# Altium PCB K157YD2.PcbDoc
Units mil, origin at the board's own origin, x right, y up, seen from the top; angles counter-clockwise.
Board outline 255.91 x 255.91 mil, 2 copper layers (Top Layer, Top, Bottom Layer, Bottom); 28 components, 22 nets, 72 pads, 2 vias.
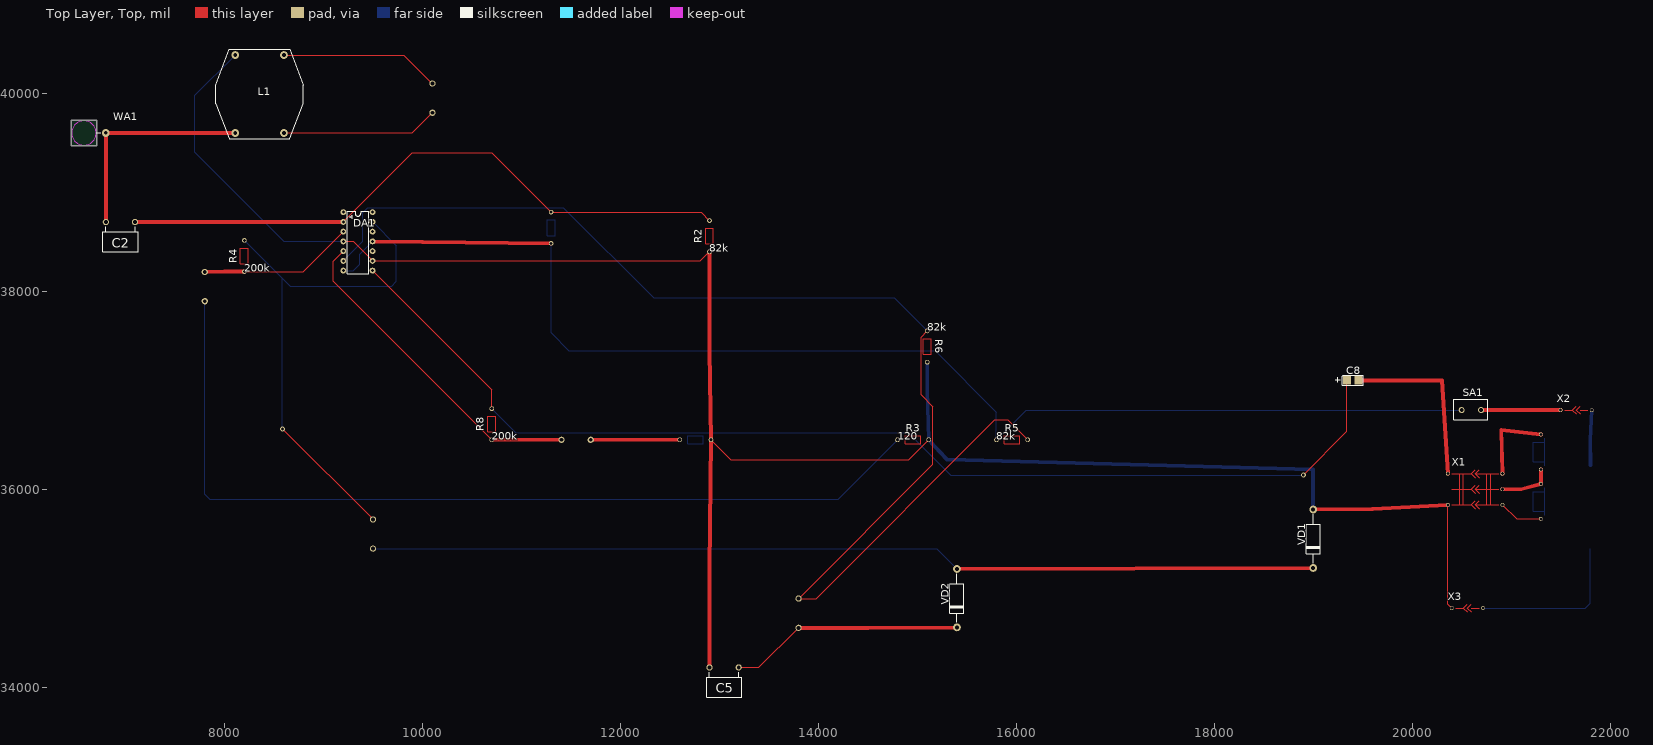
[diagram p0: Top Layer, Top view]
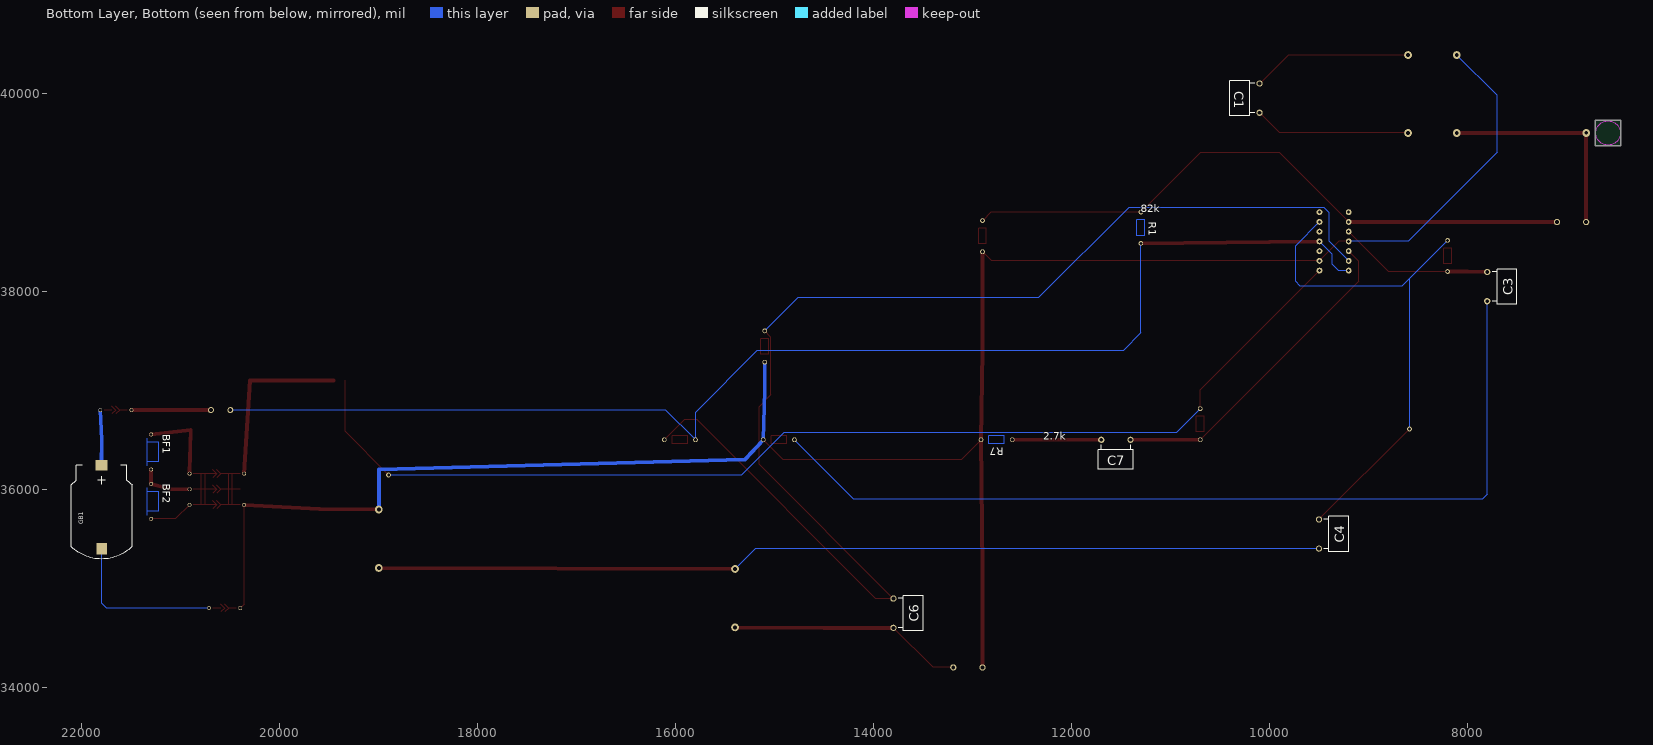
[diagram p1: Bottom Layer, Bottom view, seen from below]

## Layer stack, top to bottom
Top Solder, Top Mask: solder mask 0.4, Solder Resist, Dk 3.5
Top Layer, Top: signal copper 1.4
Dielectric 1: dielectric 12.6, FR-4, Dk 4.8
Bottom Layer, Bottom: signal copper 1.4
Bottom Solder, Bot Mask: solder mask 0.4, Solder Resist, Dk 3.5

## Board outline
6450.59,39472.05 6706.5,39472.05 6706.5,39727.95 6450.59,39727.95

## Design rules (kind name [scope] priority, off if disabled: settings)
Clearance [All] p1: gap=10 ignorepadtopadclearanceinfootprint=FALSE except(0: Arc-Hole Track-Hole SMDPad-Hole THPad-Hole Via-Hole Fill-Hole Poly-Hole Region-Hole Text-Hole; 11.81: Arc-Arc Arc-Track Arc-THPad Arc-Via Track-Track Track-THPad Track-Via THPad-THPad THPad-Via Via-Via)
PlaneClearance [All] p1: clearance=10
PolygonConnect [All] p1: connectstyle=Relief reliefconductorwidth=10 reliefentries=4 polygonreliefangle="90 Angle" airgapwidth=10
RoutingVias [All] p1: holewidth=28 width=50 viastyle="Through Hole" minholewidth=28 minwidth=50 maxholewidth=28 maxwidth=50
SolderMaskExpansion [All] p1: expansion=4
Width [All] p1: maxlimit=10 minlimit=10 preferedwidth=10
29 further rules are at their usual default settings.

## Components (designator, comment, footprint, x,y, rotation, side; value= is the part's Value field where it differs from the comment)
BF1 "" BF 21300,36200 r270 bottom
BF2 "" BF 21300,35700 r270 bottom
C1 "330" 1017-B3R 10100,40100 r270 bottom
C2 "4700" 1017-B3R 6800,38700 r0 top
C3 "4700" 1017-B3R 7800,37900 r90 bottom
C4 "4700" 1017-B3R 9500,35400 r90 bottom
C5 "0.01mk" 1017-B3R 12900,34200 r0 top
C6 "0.01mk" 1017-B3R 13800,34600 r90 bottom
C7 "0.01mk" 1017-B3R 11700,36500 r180 bottom
C8 "" CE3528-B 19400,37100 r0 top
DA1 "" DIP-14_MM 9200,38800 r0 top
GB1 "" BH023(CR2032)_SMD 21800,35400 r90 bottom
L1 "{Value}" B82722A 8600,39600 r0 top
R1 "82k" R100 11300,38800 r270 bottom
R2 "82k" R100 12900,38400 r90 top
R3 "120" R100 14800,36500 r0 top
R4 "200k" R100 8200,38200 r90 top
R5 "82k" R100 15800,36500 r0 top
R6 "82k" R100 15100,37600 r270 top
R7 "2.7k" R100 12600,36500 r0 bottom
R8 "200k" R100 10700,36500 r90 top
SA1 "" 8AS9M2RE 20500,36800 r0 top
VD1 "" DO-7_1N34(Primary) 19000,35500 r90 top
VD2 "" DO-7_1N34(Primary) 15400,34900 r90 top
WA1 "" TELESKOP_ANTENNA_Primary 6800,39600 r0 top
X1 "" X3 20400,36000 r0 top
X2 "" X 21500,36800 r0 top
X3 "" X 20400,34800 r0 top

## Footprints (in the part's own frame and the unit in brackets; to place one, negate y for a bottom-side part, rotate by r counter-clockwise, add the part's x,y. Pads: shape width x height; smd on the part's side, far side on the other; paste and mask are expansions set on the pad)
8AS9M2RE [mil]
  round 60 hole 38: 1(0,0) 2(196.85,0)
  silkscreen extent -79,-98 266,108
1017-B3R [mm]
  round 1.6 hole 1: 1(0,0) 2(7.5,0)
  silkscreen extent -0.76,-7.62 8.27,-1.26
B82722A [mm]
  round 2 hole 1: 1(0,0) 2(0,20) 3(-12.5,20) 4(-12.5,0)
  silkscreen extent -17.5,-1.5 5,21.5
BF [mm]
  round 1 hole 0.8: 1(0,0) 2(-9,0)
  Top Layer, Top lines w0.254: -1,-1 -8,-1 ; -2,-1 -2,2 -7,2 -7,-1
BH023(CR2032)_SMD [mm]
  rect 3x2.6 smd: 1(0,0)
  rect 2.6x3 smd: 2(21.4,0.05)
  silkscreen extent -2.67,-7.78 21.38,7.82
CE3528-B [mm]
  rect 2x2.2 smd: 1(-1.5,0) 2(1.5,0)
  silkscreen extent -4.44,-1.3 2.7,1.3
DIP-14_MM [mm]
  round 1.5 hole 0.8: 1(0,0) 2(0,-2.5) 3(0,-5) 4(0,-7.5) 5(0,-10) 6(0,-12.5) 7(0,-15) 8(7.5,-15) 9(7.5,-12.5) 10(7.5,-10) 11(7.5,-7.5) 12(7.5,-5) 13(7.5,-2.5) 14(7.5,0)
  silkscreen extent 1,-15.77 6.5,0.25
DO-7_1N34(Primary) [mm]
  round 2 hole 1: A(7.5,0) K(-7.5,0)
  silkscreen extent -6.25,-1.8 6.25,1.8
R100 [mm]
  round 1.2 hole 0.8: 1(0,0) 2(8,0)
  Top Layer, Top lines w0.254: 6,1 6,-1 2,-1 2,1 6,1
TELESKOP_ANTENNA_Primary [mm]
  round 2 hole 0.9: 1(0,0)
  Keep-Out Layer, Board lines w0.25: -8.75,0 ccw(c-5.625,0) -2.5,0 ccw(c-5.625,0) -8.75,0
  silkscreen extent -2.5,0 -1.25,0
X [mm]
  round 1 hole 0.8: 1(0,0) 2(8,0)
  Top Layer, Top lines w0.254: 1,0 3,0 ; 4,-1 3,0 ; 4,1 3,0 ; 5,-1 4,0 5,1 ; 5,0 7,0
X3 [mm]
  round 1 hole 0.8: 1(-1,4) 2(13,4) 3(13,0) 4(13,-4) 5(-1,-4)
  Top Layer, Top lines w0.254: 0,-4 5,-4 ; 0,0 5,0 ; 0,4 5,4 ; 2,-4 2,4 ; 3,-4 3,4 ; 6,-5 5,-4 ; 6,-3 5,-4 ; 6,-1 5,0 ; 6,1 5,0 ; 6,3 5,4 ; 6,5 5,4 ; 7,-5 6,-4 ; 7,-3 6,-4 ; 7,-1 6,0 ; 7,1 6,0 ; 7,3 6,4 ; 7,5 6,4 ; 9,-4 9,4 ; 10,-4 10,4 ; 12,-4 6,-4 ; 12,0 6,0 ; 12,4 6,4

## Via types
v1: diameter 50, hole 28, Top Layer, Top to Bottom Layer, Bottom, 2 vias

## Nets (pads, with @x,y where several pads share a name; then routed paths per layer and width w, separated by ;. In a path a pad name is that pad's centre, name@x,y a point inside that pad or via, vN(x,y) a via of type N, cw(c..) or ccw(c..) an arc to the next point about the centre after c; other vN are vias at no path point)
GND: C5.1 DA1.4 DA1.9 L1.3 R2.1 R3.2 R6.2 R7.2 VD1.A X1.5 X3.1 | length 20994.5
  Top Layer, Top w10: DA1.4 9298.43,38504.72 DA1.9 12807.87,38307.87 R2.1 ; R7.2 13114.96,36300 14914.96,36300 R3.2 ; X1.5 20360.63,34839.37 X3.1
  Top Layer, Top w39.37: C5.1 12900,35200 R7.2 12900,37400 R2.1 ; VD1.A 19600,35800 X1.5
  Bottom Layer, Bottom w10: L1.3 7700,39979.53 7700,39404.72 8600,38504.72 DA1.4
  Bottom Layer, Bottom w39.37: R6.2 15100,37000 R3.2 15300,36300 19000,36200 VD1.A
NET00000: C1.1 L1.2 | length 1619
  Top Layer, Top w10: L1.2 9812.6,40387.4 C1.1
NET00001: C1.2 L1.1 | length 1584.8
  Top Layer, Top w10: L1.1 9895.28,39600 C1.2
NET00002: C2.1 L1.4 WA1.1 | length 2207.9
  Top Layer, Top w39.37: C2.1 WA1.1 L1.4
NET00003: C2.2 DA1.2 R1.1 R2.2 | length 6377.8
  Top Layer, Top w10: DA1.2 9898.43,39400 10700,39400 R1.1 12814.96,38800 R2.2
  Top Layer, Top w39.37: C2.2 8600,38700 DA1.2
NET00005: C3.2 DA1.3 R4.1 | length 1567
  Top Layer, Top w10: R4.1 8796.85,38200 DA1.3
  Top Layer, Top w39.37: C3.2 8000,38200 R4.1
NET00006: C3.1 R3.1 | length 9219.2
  Bottom Layer, Bottom w10: C3.1 7800,35950 7850,35900 14200,35900 R3.1
NET00007: DA1.7 DA1.11 R1.2 R5.1 SA1.1 | length 13121.7
  Top Layer, Top w39.37: DA1.11 10000,38500 R1.2
  Bottom Layer, Bottom w10: DA1.7 9300,38209.45 9364.17,38273.62 9364.17,38373.62 DA1.11 ; R1.2 11300,37580 11480,37400 15180,37400 15800,36780 R5.1 16100,36800 SA1.1
NET00008: C4.2 DA1.13 R4.2 | length 5265.7
  Top Layer, Top w10: v1(8585,36610.28) C4.2
  Bottom Layer, Bottom w10: R4.2 8585,38129.96 ; v1(8585,36610.28) 8585,38129.96 ; DA1.13 9737,38459.85 9737,38100 9687,38050 8664.96,38050 8585,38129.96
NET00009: C4.1 VD1.K VD2.A | length 9584.8
  Top Layer, Top w39.37: VD2.A VD1.K
  Bottom Layer, Bottom w10: C4.1 15195.28,35400 VD2.A
NET00010: C5.2 C6.1 VD2.K | length 2370.4
  Top Layer, Top w10: C5.2 13400,34200 C6.1
  Top Layer, Top w39.37: C6.1 14500,34600 VD2.K
NET00011: C6.2 DA1.6 R5.2 R6.1 | length 13296.1
  Top Layer, Top w10: R6.1 15038,37538 15038,36953 15156,36835 15156,36251.28 C6.2 13979.28,34895.28 15784,36700 15914.96,36700 R5.2
  Bottom Layer, Bottom w10: DA1.6 9398,38505.87 9398,38796 9449,38847 11423,38847 12335,37935 14765,37935 R6.1
NET00012: C7.2 DA1.5 R8.1 | length 3315.2
  Top Layer, Top w10: DA1.5 9100,38306.3 9100,38100 R8.1
  Top Layer, Top w39.37: R8.1 C7.2
NET00013: C7.1 R7.1 | length 900
  Top Layer, Top w39.37: C7.1 R7.1
NET00014: C8.1 DA1.8 R8.2 | length 11510.1
  Top Layer, Top w10: DA1.8 10700,37004.72 R8.2 ; v1(18900,36144) 19340.94,36584.94 C8.1
  Bottom Layer, Bottom w10: R8.2 10942.96,36572 14909,36572 15337,36144 v1(18900,36144)
NET00015: C8.2 X1.1 | length 1785.4
  Top Layer, Top w39.37: C8.2 20300,37100 X1.1
NET00016: BF1.2 X1.2 | length 845.3
  Top Layer, Top w39.37: X1.2 20900,36600 BF1.2
NET00017: BF1.1 BF2.2 X1.3 | length 541.1
  Top Layer, Top w39.37: X1.3 21100,36000 BF2.2 BF1.1
NET00018: BF2.1 X1.4 | length 447.2
  Top Layer, Top w10: X1.4 21054.33,35700 BF2.1
NET00019: SA1.2 X2.1 | length 803.2
  Top Layer, Top w39.37: SA1.2 X2.1
NET00020: GB1.2 X2.2 | length 557.9
  Bottom Layer, Bottom w39.37: GB1.2 21800,36500 X2.2
NET00021: GB1.1 X3.2 | length 1655.8
  Bottom Layer, Bottom w10: X3.2 21750,34800 21800,34850 GB1.1
pads on no net: DA1.1 DA1.10 DA1.12 DA1.14